# Altium PCB LV.PcbDoc
Units mil, origin at the board's own origin, x right, y up, seen from the top; angles counter-clockwise.
Board outline 1330 x 1365 mil, 2 copper layers (Top Layer, Bottom Layer); 16 components, 22 nets, 70 pads, 0 vias.
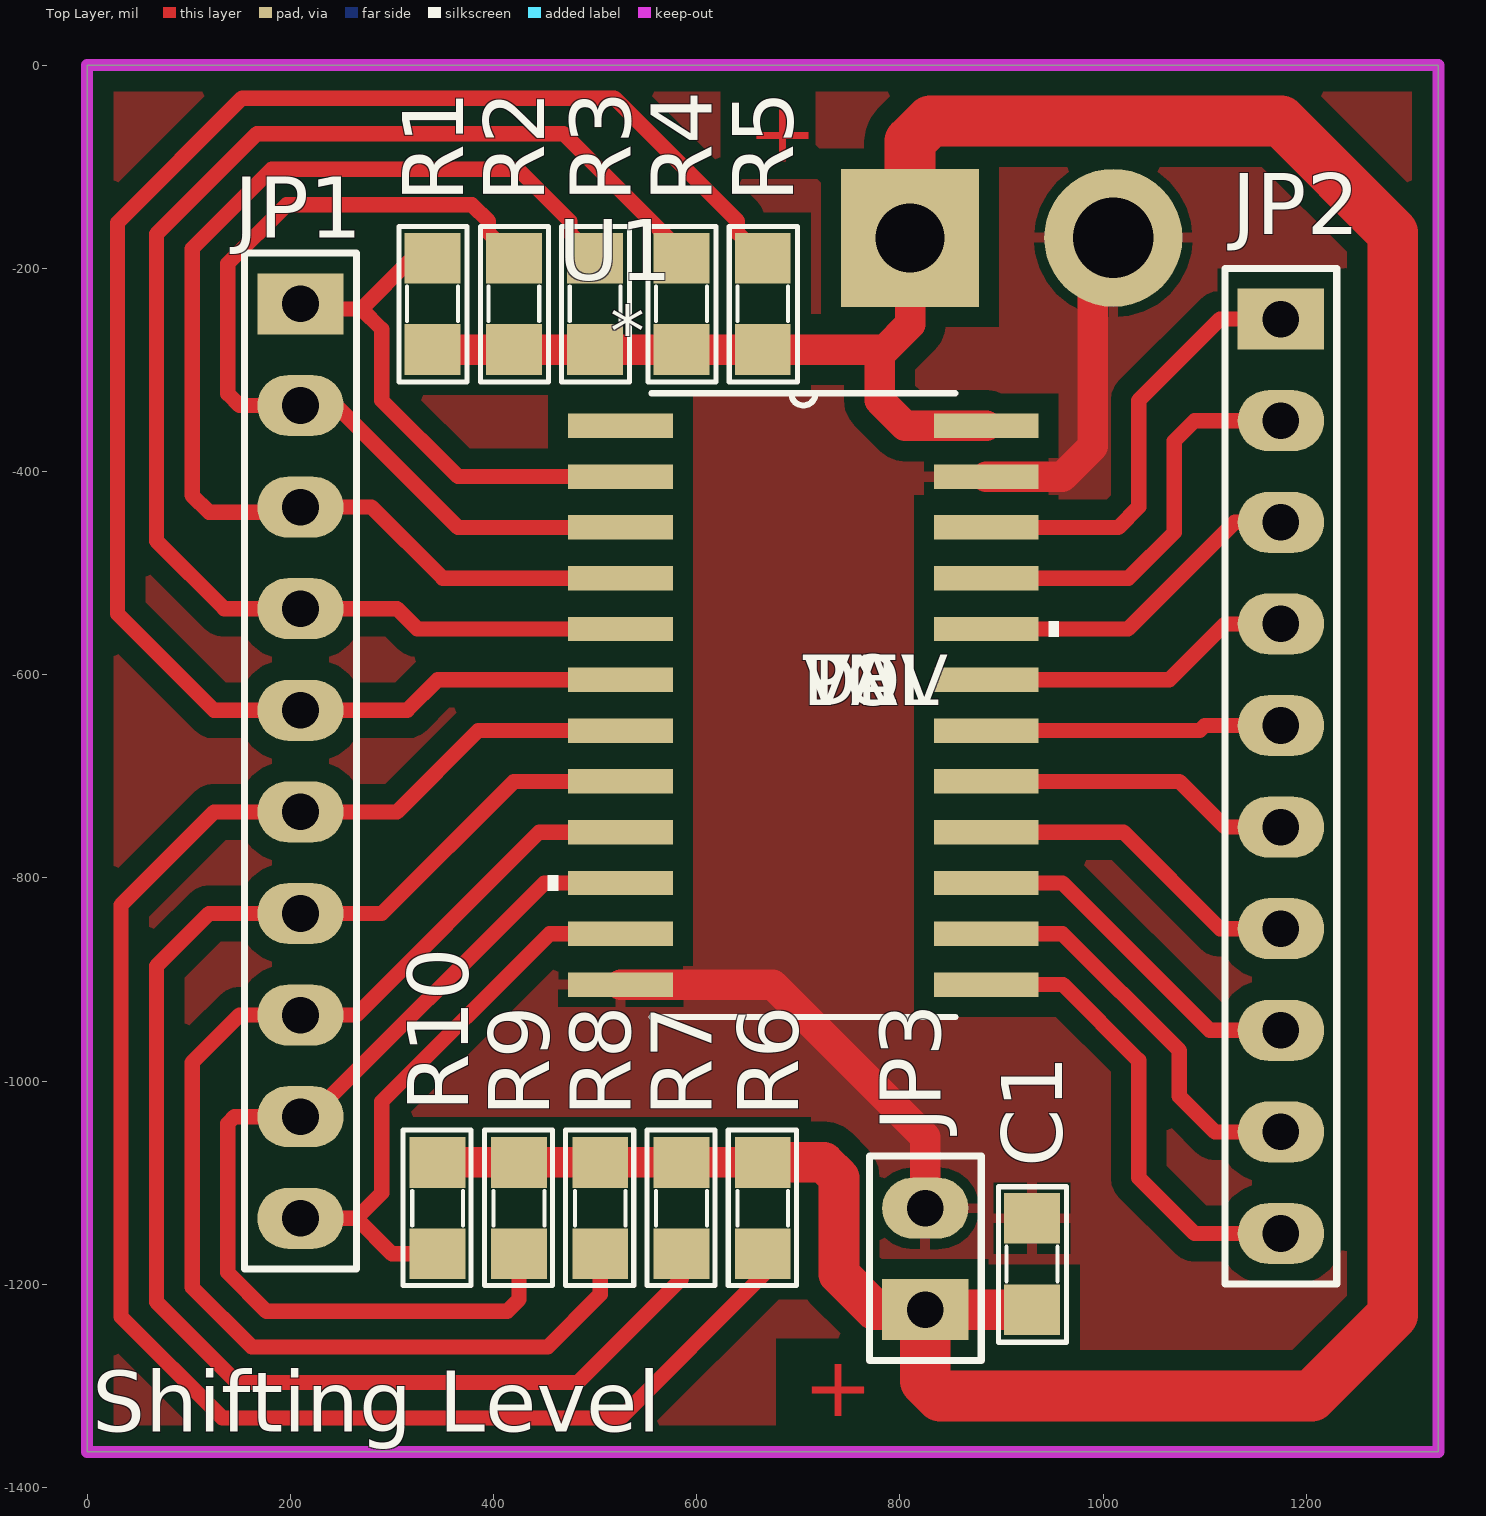
[diagram p0: Top Layer view]
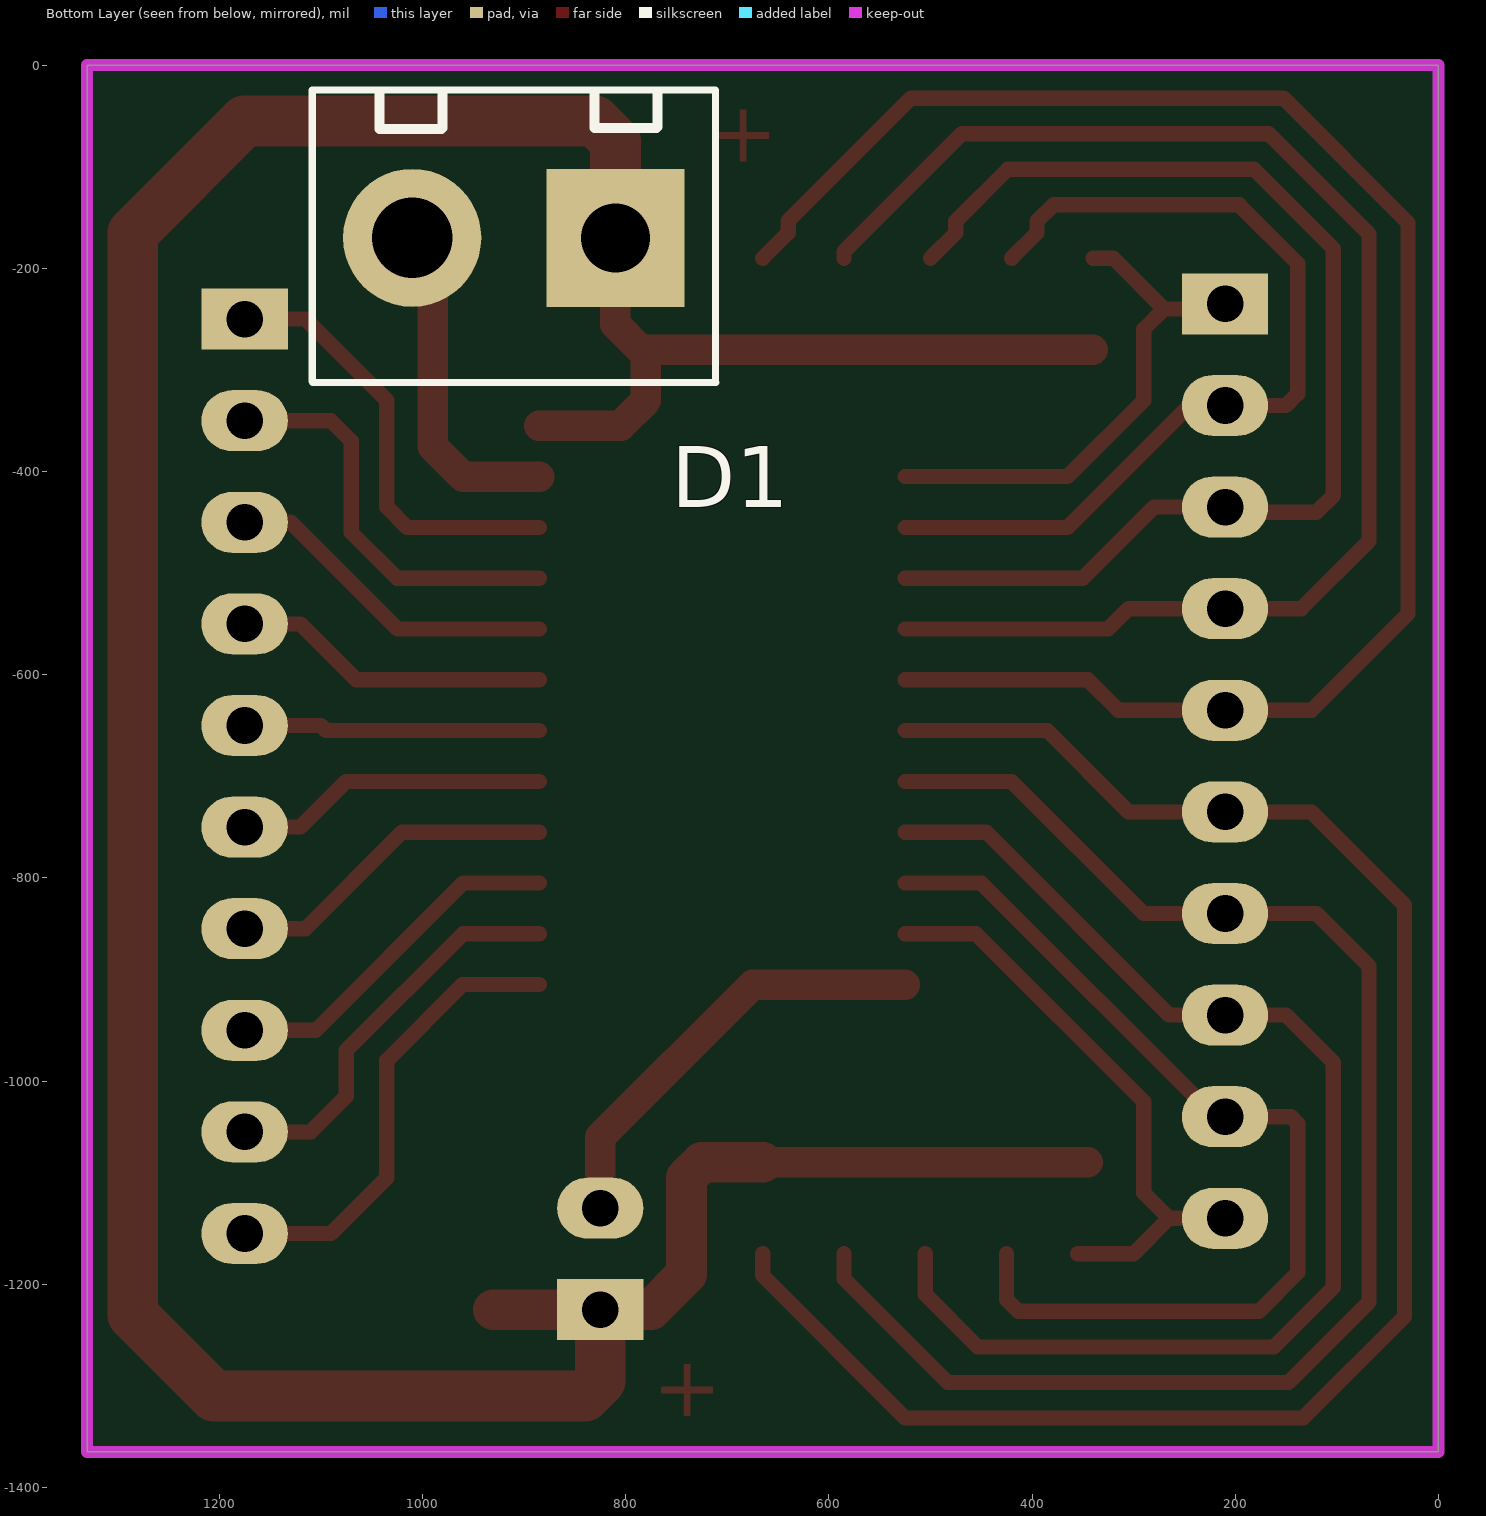
[diagram p1: Bottom Layer view, seen from below]
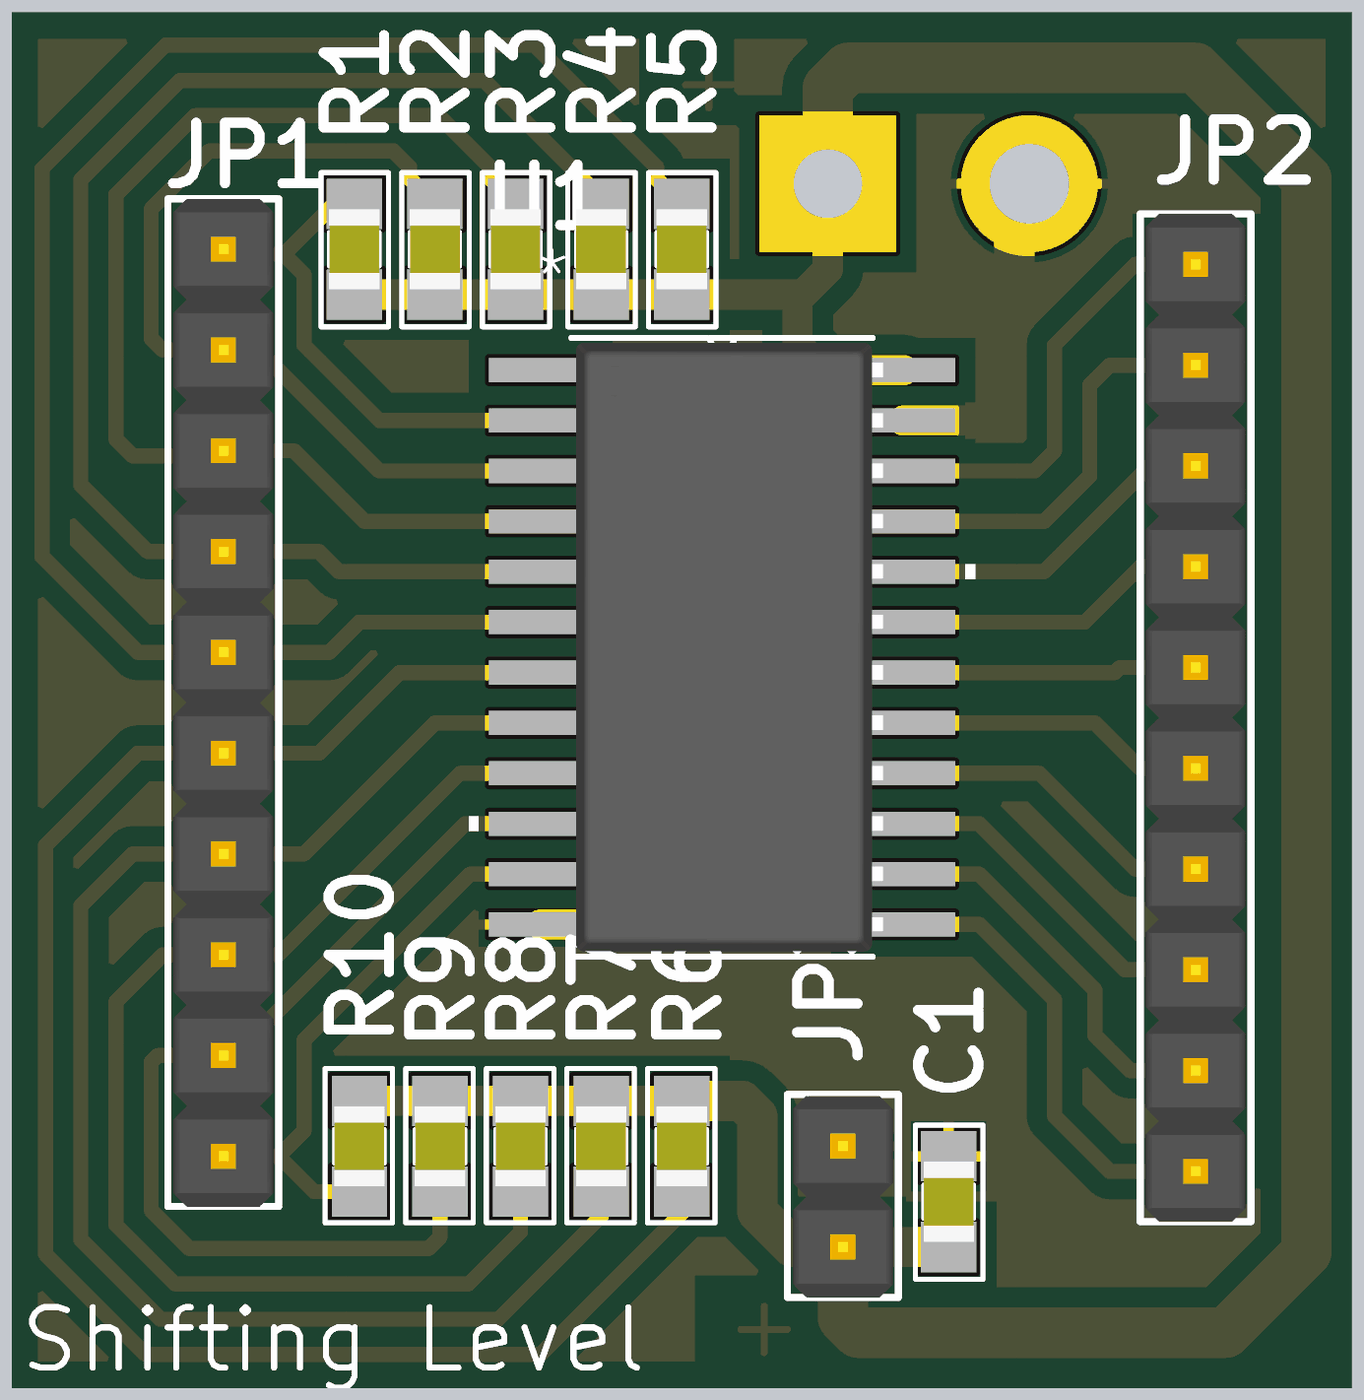
[diagram p2: 3D render of the assembled board from above, using the file's embedded part models]

## Layer stack, top to bottom
Top Solder: solder mask 0.4, Solder Resist, Dk 3.5
Top Layer: signal copper 1.4
Dielectric 1: dielectric 12.6, FR-4, Dk 4.8
Bottom Layer: signal copper 1.4
Bottom Solder: solder mask 0.4, Solder Resist, Dk 3.5

## Board outline
0,-1365 0,0 1330,0 1330,-1365

## Design rules (kind name [scope] priority, off if disabled: settings)
Clearance [All] p1: gap=20
PolygonConnect [All] p1: connectstyle=Relief reliefconductorwidth=10 reliefentries=4 polygonreliefangle="90 Angle" airgapwidth=10
RoutingVias [All] p1: holewidth=28 width=50 viastyle="Through Hole" minholewidth=28 minwidth=50 maxholewidth=28 maxwidth=50
SolderMaskExpansion [All] p1: expansion=4
Width [All] p1: maxlimit=50 minlimit=8 preferedwidth=15
29 further rules are at their usual default settings.

## Components (designator, comment, footprint, x,y, rotation, side; value= is the part's Value field where it differs from the comment)
C1 "100nF" 0805_C 930,-1180 r90 top
D1 "DOMINO" DOMINO2 810,-170 r0 bottom
JP1 "JP10" HEAD10 210,-235 r0 top
JP2 "JP10" HEAD10 1175,-250 r0 top
JP3 "JP2" HEAD2 825,-1225 r90 top
R1 "0805_R" 0805_R 340,-235 r90 top
R2 "0805_R" 0805_R 420,-235 r90 top
R3 "0805_R" 0805_R 500,-235 r90 top
R4 "0805_R" 0805_R 585,-235 r90 top
R5 "0805_R" 0805_R 665,-235 r90 top
R6 "0805_R" 0805_R 665,-1125 r270 top
R7 "0805_R" 0805_R 585,-1125 r270 top
R8 "0805_R" 0805_R 505,-1125 r270 top
R9 "0805_R" 0805_R 425,-1125 r270 top
R10 "0805_R" 0805_R 345,-1125 r270 top
U1 "SN74CBTD3861_DW_" DW24-M 705,-630 r0 top

## Footprints (in the part's own frame and the unit in brackets; to place one, negate y for a bottom-side part, rotate by r counter-clockwise, add the part's x,y. Pads: shape width x height; smd on the part's side, far side on the other; paste and mask are expansions set on the pad)
0805_C [mil]
  rect 50x55 smd: 1(-45,0) 2(45,0)
  silkscreen extent -77,-34 76,33, body extent -40,-25 40,25, height 24
0805_R [mil]
  rect 50x55 smd: 1(-45,0) 2(45,0)
  silkscreen extent -77,-34 76,33, body extent -40,-25 40,25, height 24
DOMINO2 [mil]
  rect 136x136 hole 68: 1(0,0)
  round 136 hole 79: 2(200,0)
  silkscreen extent -99,-146 298,142
DW24-M [mil]
  rect 103x24 smd: 1(-180,275) 2(-180,225) 3(-180,175) 4(-180,125) 5(-180,75) 6(-180,25) 7(-180,-25) 8(-180,-75) 9(-180,-125) 10(-180,-175) 11(-180,-225) 12(-180,-275) 13(180,-275) 14(180,-225) 15(180,-175) 16(180,-125) 17(180,-75) 18(180,-25) 19(180,25) 20(180,75) 21(180,125) 22(180,175) 23(180,225) 24(180,275)
  silkscreen extent -252,-307 252,307, body extent -200,-302 204,302, height 41
HEAD2 [mil]
  rect 60x85 hole 36: 1(0,0)
  oval 60x85 hole 36: 2(100,0)
  silkscreen extent -50,-55 151,55, body extent -50,-50 150,50, height 374
HEAD10 [mil]
  rect 85x60 hole 36: 1(0,0)
  oval 85x60 hole 36: 2(0,-100) 3(0,-200) 4(0,-300) 5(0,-400) 6(0,-500) 7(0,-600) 8(0,-700) 9(0,-800) 10(0,-900)
  silkscreen extent -55,-950 55,50, body extent -50,-950 50,50, height 374

## Part data
C1: library part C, "0805 SMD capacitor"
D1: library part "Domino 2"
JP1 JP2: library part HEAD10, "Connector 10"
JP3: library part HEAD2, "Connector 2"
R1 R2 R3 R4 R5 R6 R7 R8 R9 R10: "0805 SMD resistor"
U1: "Imported"

## Nets (pads, with @x,y where several pads share a name; then routed paths per layer and width w, separated by ;. In a path a pad name is that pad's centre, name@x,y a point inside that pad or via, vN(x,y) a via of type N, cw(c..) or ccw(c..) an arc to the next point about the centre after c; other vN are vias at no path point)
GND: C1.2 D1.2 JP3.2 U1.12 U1.23 | length 762.8
  Top Layer w30: U1.12 675,-905 825,-1055 JP3.2 ; U1.23 960,-405 990,-375 990,-190 D1.2
NetJP1_1: JP1.1 R1.2 U1.2 | length 517.1
  Top Layer w15: JP1.1 215,-240 270,-240 ; R1.2 320,-190 270,-240 ; U1.2 365,-405 290,-330 290,-260 270,-240
NetJP1_2: JP1.2 R2.2 U1.3 | length 903.2
  Top Layer w15: R2.2 395,-165 395,-153.61 378.89,-137.5 196.11,-137.5 138.41,-195.21 138.41,-323.41 150,-335 JP1.2 245,-335 365,-455 U1.3
NetJP1_3: JP1.3 R3.2 U1.4 | length 1174.1
  Top Layer w15: R3.2 475,-165 475,-153.61 423.89,-102.5 181.61,-102.5 103.41,-180.71 103.41,-423.41 120,-440 205,-440 JP1.3 280,-435 350,-505 U1.4
NetJP1_4: JP1.4 R4.2 U1.5 | length 1406.6
  Top Layer w15: U1.5 325,-555 305,-535 JP1.4 135,-535 68.41,-468.41 68.41,-166.21 167.12,-67.5 468.89,-67.5 585,-183.61 R4.2
NetJP1_5: JP1.5 R5.2 U1.6 | length 1689.4
  Top Layer w15: U1.6 345,-605 315,-635 JP1.5 125,-635 30,-540 30,-155.12 152.62,-32.5 518.89,-32.5 640,-153.61 640,-165 R5.2
NetJP1_6: JP1.6 R6.2 U1.7 | length 1720.3
  Top Layer w15: U1.7 385,-655 305,-735 JP1.6 125,-735 33.41,-826.6 33.41,-1231.9 133.1,-1331.6 524.8,-1331.6 665,-1191.39 R6.2
NetJP1_7: JP1.7 R7.2 U1.8 | length 1478.8
  Top Layer w15: U1.8 420,-705 290,-835 JP1.7 120,-835 68.41,-886.6 68.41,-1217.4 147.6,-1296.6 482.9,-1296.6 585,-1194.5 R7.2
NetJP1_8: JP1.8 R8.2 U1.9 | length 1224
  Top Layer w15: R8.2 505,-1210 453.41,-1261.6 162.1,-1261.6 103.41,-1202.9 103.41,-981.6 150,-935 JP1.8 265,-935 445,-755 U1.9
NetJP1_9: JP1.9 R9.2 U1.10 | length 983.6
  Top Layer w15: R9.2 425,-1215 413.41,-1226.6 176.6,-1226.6 138.41,-1188.41 138.41,-1041.6 145,-1035 JP1.9 220,-1035 450,-805 U1.10
NetJP1_10: JP1.10 R10.2 U1.11 | length 588.2
  Top Layer w15: JP1.10 265,-1135 ; R10.2@355,-1170 300,-1170 265,-1135 ; U1.11 455,-855 290,-1020 290,-1110 265,-1135
NetJP2_1: JP2.1 U1.22 | length 436.4
  Top Layer w15: U1.22 1015,-455 1035,-435 1035,-330 1115,-250 JP2.1
NetJP2_2: JP2.2 U1.21 | length 406.9
  Top Layer w15: U1.21 1025,-505 1070,-460 1070,-370 1090,-350 JP2.2
NetJP2_3: JP2.3 U1.20 | length 333.5
  Top Layer w15: U1.20 1024.5,-555 1129.5,-450 JP2.3
NetJP2_4: JP2.4 U1.19 | length 312.8
  Top Layer w15: U1.19 1065,-605 1120,-550 JP2.4
NetJP2_5: JP2.5 U1.18 | length 292.1
  Top Layer w15: U1.18 1095,-655 1100,-650 JP2.5
NetJP2_6: JP2.6 U1.17 | length 308.6
  Top Layer w15: U1.17 1075,-705 1120,-750 JP2.6
NetJP2_7: JP2.7 U1.16 | length 329.4
  Top Layer w15: U1.16 1020,-755 1115,-850 JP2.7
NetJP2_8: JP2.8 U1.15 | length 350.1
  Top Layer w15: U1.15 960,-805 1105,-950 JP2.8
NetJP2_9: JP2.9 U1.14 | length 397.1
  Top Layer w15: U1.14 960,-855 1075,-970 1075,-1015 1110,-1050 JP2.9
NetJP2_10: JP2.10 U1.13 | length 459.1
  Top Layer w15: U1.13 960.5,-905 1035,-979.5 1035,-1095 1090,-1150 JP2.10
VCC: C1.1 D1.1 JP3.1 R1.1 R2.1 R3.1 R4.1 R5.1 R6.1 R7.1 R8.1 R9.1 R10.1 U1.24 | length 3691.7
  Top Layer w30: R1.1 R2.1 R3.1 R4.1 R5.1 785,-280 ; R10.1 R9.1 R8.1 R7.1 R6.1 ; D1.1 810,-255 785,-280 ; U1.24 805,-355 780,-330 780,-285 785,-280
  Top Layer w40: R6.1 725,-1080 740,-1095 740,-1190 775,-1225 JP3.1 C1.1
  Top Layer w50: D1.1 810,-75 830,-55 1175,-55 1285,-165 1285,-1230 1205,-1310 840,-1310 825,-1295 JP3.1
pads on no net: U1.1

## Polygon pours and split planes (outlines as drawn)
GND on Top Layer "TOP" (solid, pour order 2): 10,-10 1315,-10 1315,-1350 10,-1350

## Keep-outs
Keep-Out Layer:
  lines w11.81: 0,-1365 1330,-1365 1330,0 0,0 0,-1330 0,-1365

## Other copper
Top Layer:
  text "+" at 650,-95 h60
  text "+" at 705,-1330 h60

## Silkscreen, mask and mechanical layers (free items; w line width, h text height)
Top Overlay:
  text "Shifting Level" at 5,-1345 h60

## Text inside footprints (layer, text, board x,y; h text height)
U1: Top Overlay "*" at 515,-286 h50; Top Overlay "PN" at 705,-630 h50; Top Overlay "DEV" at 705,-630 h50; Top Overlay "VAL" at 705,-630 h50; Top Overlay "TOL" at 705,-630 h50; Mechanical 1 "*" at 515,-286 h50; Mechanical 1 "RefDes2" at 705,-630 h50